# Altium PCB smart_charger_pcb.PcbDoc (part 2 of 2)
Units mm, origin at the board's own origin, x right, y up, seen from the top; angles counter-clockwise.
Board outline 250 x 183.13 mm, 4 copper layers (Top Layer, Ground, Power, Bottom Layer); 179 components, 118 nets, 581 pads, 0 vias.
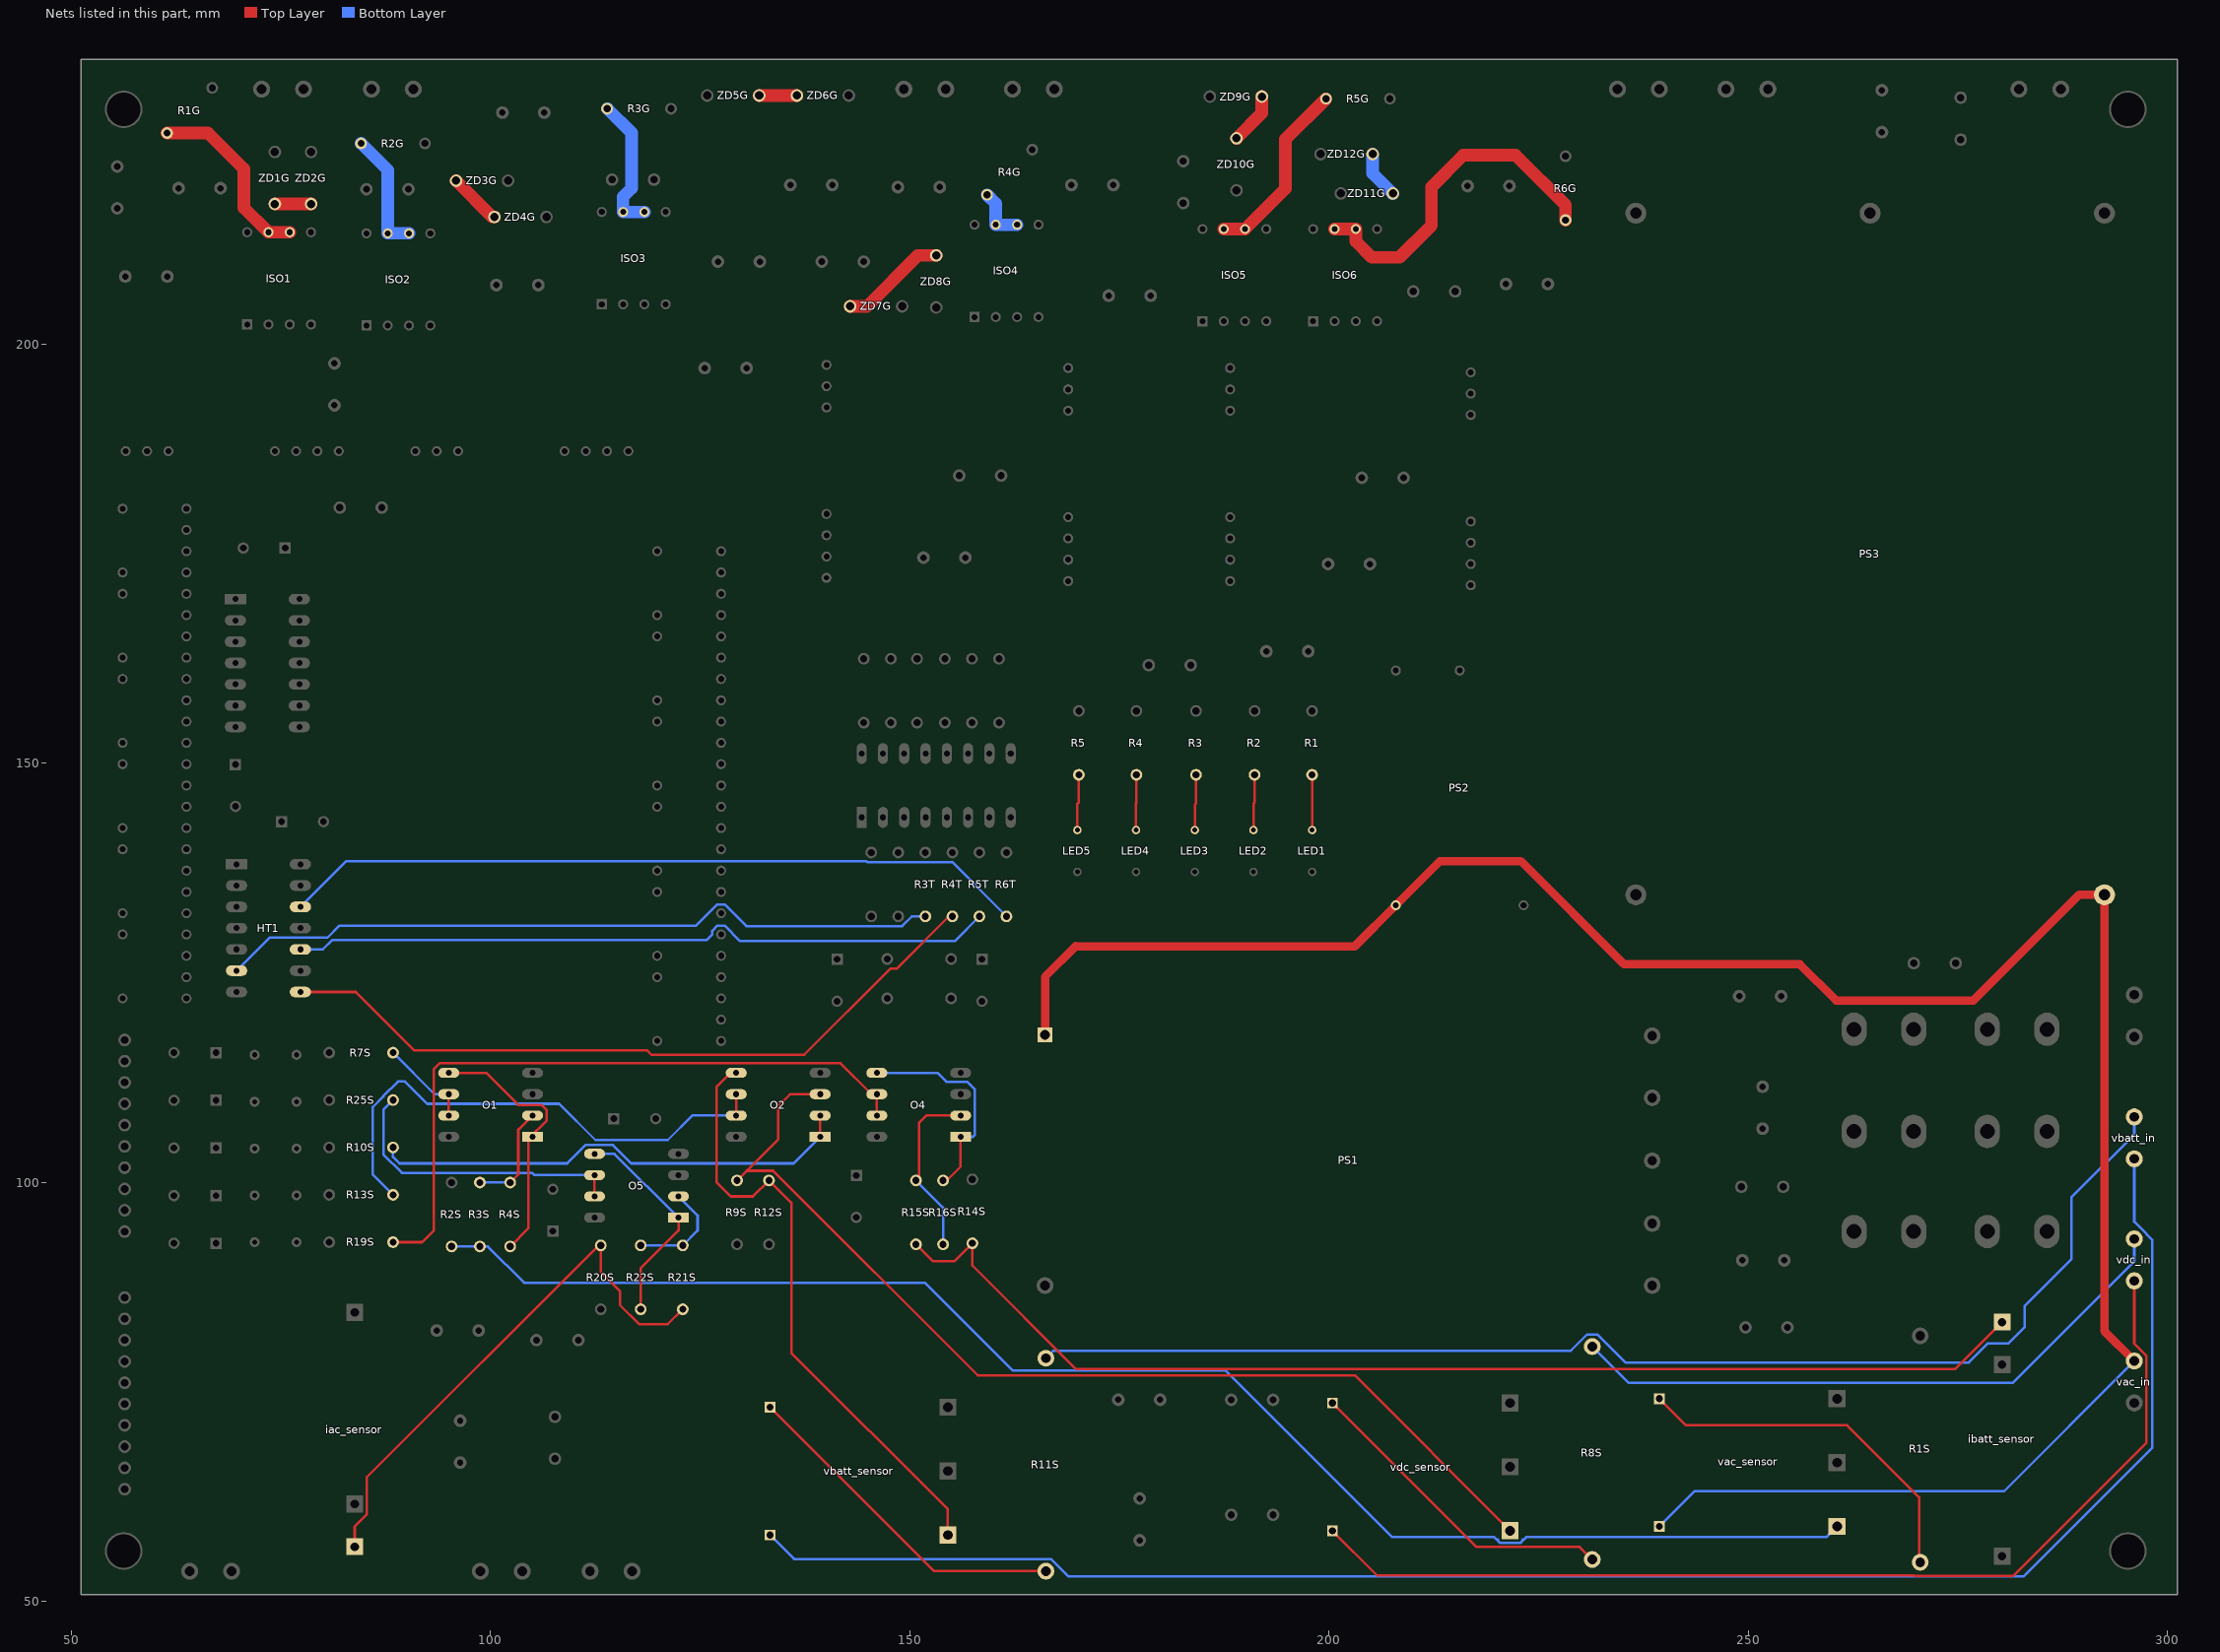
[diagram p4: the nets of this part, all layers, seen from the top]

## Nets (pads, with @x,y where several pads share a name; then routed paths per layer and width w, separated by ;. In a path a pad name is that pad's centre, name@x,y a point inside that pad or via, vN(x,y) a via of type N, cw(c..) or ccw(c..) an arc to the next point about the centre after c; other vN are vias at no path point) (continued)
NetHT1_3Y: HT1.3Y R3T.1 | length 87
  Bottom Layer w0.3: HT1.3Y@69.723,125.222 73.66,129.159 80.558,129.159 81.989,130.59 124.533,130.59 127.073,133.13 127.943,133.13 130.524,130.549 149.117,130.549 150.267,131.699 R3T.1@151.867,131.699
NetHT1_4Y: HT1.4Y R4T.1 | length 87.7
  Top Layer w0.3: HT1.4Y@77.343,122.682 83.947,122.682 90.932,115.697 118.698,115.697 119.205,115.19 137.415,115.19 147.694,125.469 148.47,125.469 154.7,131.699 R4T.1@155.092,131.699
NetHT1_5Y: HT1.5Y R5T.1 | length 84.4
  Bottom Layer w0.3: HT1.5Y@77.343,127.762 80.01,127.762 81.153,128.905 125.81,128.905 126.458,129.553 126.458,129.975 127.073,130.59 127.943,130.59 129.79,128.743 155.362,128.743 R5T.1@158.318,131.699
NetHT1_6Y: HT1.6Y R6T.1 | length 89.2
  Bottom Layer w0.3: HT1.6Y@77.343,132.842 82.804,138.303 144.805,138.303 144.939,138.169 155.074,138.169 R6T.1@161.544,131.699
Netiac_sensor_M: iac_sensor.M R20S.2 R21S.2 | length 65.1
  Top Layer w0.3: iac_sensor.M@83.82,56.515 83.82,58.927 85.286,60.393 85.286,64.839 112.649,92.202 113.157,92.202 113.157,89.281 115.443,86.995 115.443,85.344 117.729,83.058 121.158,83.058 R21S.2@122.936,84.836
Netibatt_sensor_M: ibatt_sensor.M R14S.2 R15S.2 | length 141.4
  Top Layer w0.3: R15S.2@150.749,92.583 152.781,90.551 155.321,90.551 R14S.2@157.48,92.71 157.48,90.043 169.799,77.724 274.701,77.724 ibatt_sensor.M@280.289,83.312
NetISO1_6: ISO1.6 ISO1.7 R1G.1 | length 22.2
  Top Layer w1.5: R1G.1@61.441,225.144 66.321,225.144 70.612,220.853 70.612,216.232 ISO1.7@73.533,213.311 ISO1.6@76.073,213.311
NetISO2_6: ISO2.6 ISO2.7 R2G.1 | length 14.6
  Bottom Layer w1.5: R2G.1@84.582,223.901 87.757,220.726 ISO2.7@87.757,213.184 ISO2.6@90.297,213.184
NetISO3_6: ISO3.6 ISO3.7 R3G.1 | length 16.5
  Bottom Layer w1.5: R3G.1@113.919,228.044 113.967,228.044 116.84,225.171 116.84,218.567 115.824,217.551 ISO3.7@115.824,215.724 ISO3.6@118.364,215.724
NetISO4_6: ISO4.6 ISO4.7 R4G.1 | length 6.6
  Bottom Layer w1.5: R4G.1@159.231,217.778 160.274,216.735 ISO4.7@160.274,214.2 ISO4.6@162.814,214.2
NetISO5_6: ISO5.6 ISO5.7 R5G.1 | length 22.1
  Top Layer w1.5: ISO5.7@187.452,213.692 ISO5.6@189.992,213.692 194.818,218.518 194.818,224.409 R5G.1@199.644,229.235
NetISO6_6: ISO6.6 ISO6.7 R6G.1 | length 41.8
  Top Layer w1.5: ISO6.7@200.66,213.692 ISO6.6@203.2,213.692 203.2,212.217 205.105,210.312 208.407,210.312 212.217,214.122 212.217,218.694 216.027,222.504 222.25,222.504 228.219,216.535 R6G.1@228.219,214.757
NetLED1_2: LED1.2 R1.2 | length 6.2
  Top Layer w0.3: R1.2@197.993,148.209 197.993,145.092 198,145.085 LED1.2@198,142
NetLED2_2: LED2.2 R2.2 | length 6.5
  Top Layer w0.3: LED2.2@191,142 191,145.161 191.135,145.296 R2.2@191.135,148.463
NetLED3_2: LED3.2 R3.2 | length 6.3
  Top Layer w0.3: LED3.2@184,142 184,145.009 184.15,145.159 R3.2@184.15,148.209
NetLED4_2: LED4.2 R4.2 | length 6.5
  Top Layer w0.3: LED4.2@177,142 177,145.212 177.038,145.25 R4.2@177.038,148.463
NetLED5_2: LED5.2 R5.1 | length 6.5
  Top Layer w0.3: LED5.2@170,142 170,145.136 170.18,145.316 R5.1@170.18,148.463
NetO1_1: O1.1 O1.5 R4S.1 | length 31.6
  Top Layer w0.3: O1.5@95.029,113.03 99.517,113.03 103.327,109.22 106.07,109.22 106.731,108.56 106.731,107.366 104.521,105.156 104.521,94.488 R4S.1@102.362,92.329
NetO1_2: O1.2 R3S.1 R4S.2 | length 12.8
  Top Layer w0.3: R4S.2@102.362,99.949 103.329,100.916 103.329,106.25 O1.2@105.029,107.95
  Bottom Layer w0.3: R3S.1@98.545,99.949 R4S.2@102.228,99.949
NetO1_6: O1.6 O1.7 R7S.2 | length 11.2
  Top Layer w0.3: O1.7@95.029,107.95 O1.6@95.029,110.49
  Bottom Layer w0.3: R7S.2@88.392,115.443 93.345,110.49 O1.6@95.029,110.49
NetO2_1: O2.1 O2.2 R10S.1 | length 58.1
  Top Layer w0.3: O2.1@139.319,105.41 O2.2@139.319,107.95
  Bottom Layer w0.3: R10S.1@88.392,104.14 88.392,102.997 89.154,102.235 109.15,102.235 111.343,104.428 114.607,104.428 116.8,102.235 136.144,102.235 O2.1@139.319,105.41
NetO2_3: O2.3 R9S.2 vdc_sensor.M | length 125.3
  Top Layer w0.3: R9S.2@129.413,100.203 130.563,101.353 ; O2.3@139.319,110.49 135.738,110.49 134.341,109.093 134.341,105.131 130.563,101.353 ; vdc_sensor.M@221.606,58.42 203.064,76.962 158.115,76.962 133.724,101.353 130.563,101.353
NetO2_5: O2.5 R12S.2 vbatt_sensor.M | length 73.3
  Top Layer w0.3: O2.5@129.319,113.03 128.651,113.03 127,111.379 127,99.949 128.651,98.298 131.318,98.298 R12S.2@133.223,100.203 135.89,97.536 135.89,79.629 154.55,60.969 vbatt_sensor.M@154.55,57.912
NetO2_6: O2.6 O2.7 R13S.1 | length 62.7
  Top Layer w0.3: O2.7@129.319,107.95 O2.6@129.319,110.49
  Bottom Layer w0.3: R13S.1@88.392,98.489 85.979,100.901 85.979,108.966 87.242,110.229 87.242,110.268 88.988,112.014 89.789,112.014 92.456,109.347 108.204,109.347 112.522,105.029 121.158,105.029 124.079,107.95 O2.7@129.319,107.95
NetO4_1: O4.1 O4.5 R16S.1 | length 26
  Top Layer w0.3: R16S.1@154.178,99.949 156.083,101.854 O4.1@156.083,105.41
  Bottom Layer w0.3: O4.5@146.083,113.03 153.314,113.03 154.381,111.963 156.87,111.963 157.785,111.049 157.785,105.664 157.531,105.41 O4.1@156.083,105.41
NetO4_2: O4.2 R15S.1 R16S.2 | length 20.8
  Top Layer w0.3: R15S.1@151.105,100.559 151.105,107.061 151.994,107.95 O4.2@156.083,107.95
  Bottom Layer w0.3: R15S.1@150.749,100.203 153.987,96.965 R16S.2@153.987,92.583
NetO4_6: O4.6 O4.7 R19S.2 | length 81.9
  Top Layer w0.3: R19S.2@88.392,92.837 91.846,92.837 93.269,94.259 93.269,113.513 93.929,114.173 141.757,114.173 145.44,110.49 O4.6@146.083,110.49 O4.7@146.083,107.95
NetO5_1: O5.1 O5.5 R22S.1 | length 25.9
  Top Layer w0.3: R22S.1@117.919,84.836 117.919,89.725 122.428,94.234 O5.1@122.428,95.758
  Bottom Layer w0.3: O5.5@112.428,103.378 114.808,103.378 O5.1@122.428,95.758
NetO5_2: O5.2 R21S.1 R22S.2 | length 12.5
  Bottom Layer w0.3: R22S.2@117.919,92.456 R21S.1@122.936,92.456 124.714,94.234 124.714,96.012 O5.2@122.428,98.298
NetO5_6: O5.6 O5.7 R25S.2 | length 35.7
  Top Layer w0.3: O5.7@112.428,98.298 O5.6@112.428,100.838
  Bottom Layer w0.3: R25S.2@88.392,109.791 87.242,108.641 87.242,103.298 89.441,101.099 104.997,101.099 105.258,100.838 O5.6@112.428,100.838
NetPS1_ACN: PS1.ACN PS2.1 PS3.2 vac_in.2 vac_sensor.HV- | length 273
  Top Layer w1: PS1.ACN@166.141,117.566 166.141,124.485 169.824,128.168 ; 169.824,128.118 203.068,128.118 PS2.1@207.975,133.025 213.253,138.303 222.885,138.303 235.204,125.984 256.159,125.984 260.477,121.666 276.86,121.666 289.473,134.279 PS3.2@292.481,134.279 292.481,82.216 vac_in.2@296.037,78.66
  Bottom Layer w0.3: vac_sensor.HV-@239.395,58.928 243.586,63.119 280.496,63.119 vac_in.2@296.037,78.66
NetR1S_2: R1S.2 vac_sensor.HV+ | length 43.8
  Top Layer w0.3: vac_sensor.HV+@239.395,74.168 242.57,70.993 261.798,70.993 270.383,62.408 R1S.2@270.383,54.483
NetR2S_2: R2S.2 R3S.2 vac_sensor.M | length 180
  Bottom Layer w0.3: 96.196,92.329 R3S.2@98.742,92.329 99.695,92.329 104.013,88.011 151.805,88.011 162.272,77.544 187.657,77.544 207.543,57.658 219.7,57.658 219.989,57.369 220.14,57.369 220.14,57.218 220.404,56.954 222.809,56.954 223.072,57.218 223.072,57.369 223.224,57.369 223.513,57.658 259.325,57.658 vac_sensor.M@260.595,58.928
NetR8S_1: R8S.1 vdc_in.2 | length 75.1
  Bottom Layer w0.3: R8S.1@231.394,80.391 235.712,76.073 281.559,76.073 296.037,90.551 vdc_in.2@296.037,93.223
NetR8S_2: R8S.2 vdc_sensor.HV+ | length 38.7
  Top Layer w0.3: vdc_sensor.HV+@200.406,73.66 217.576,56.49 229.895,56.49 R8S.2@231.394,54.991
NetR11S_1: R11S.1 vbatt_in.2 | length 151.5
  Bottom Layer w0.3: R11S.1@166.243,78.994 167.132,79.883 228.835,79.883 230.793,81.841 231.995,81.841 235.35,78.486 276.312,78.486 278.598,80.772 281.051,80.772 282.956,82.677 282.956,85.217 288.544,90.805 288.544,98.171 296.037,105.664 vbatt_in.2@296.037,107.785
NetR11S_2: R11S.2 vbatt_sensor.HV+ | length 41
  Top Layer w0.3: vbatt_sensor.HV+@133.35,73.152 152.908,53.594 R11S.2@166.243,53.594
Netvbatt_in_1: vbatt_in.1 vbatt_sensor.HV- | length 208.6
  Bottom Layer w0.3: vbatt_sensor.HV-@133.35,57.912 136.218,55.044 166.844,55.044 168.929,52.959 282.829,52.959 298.2,68.33 298.2,93.087 297.503,93.784 297.503,93.83 296.037,95.296 vbatt_in.1@296.037,102.785
Netvdc_in_1: vdc_in.1 vdc_sensor.HV- | length 125.8
  Top Layer w0.3: vdc_sensor.HV-@200.406,58.42 205.74,53.086 269.729,53.086 269.782,53.033 281.633,53.033 297.503,68.903 297.503,79.267 296.037,80.733 vdc_in.1@296.037,88.223
NetZD1G_2: ZD1G.2 ZD2G.2 | length 4.3
  Top Layer w1.5: ZD1G.2@74.295,216.685 ZD2G.2@78.613,216.685
NetZD3G_2: ZD3G.2 ZD4G.2 | length 6.4
  Top Layer w1.5: ZD3G.2@95.908,219.456 100.226,215.138 ZD4G.2@100.48,215.138
NetZD5G_2: ZD5G.2 ZD6G.2 | length 4.5
  Top Layer w1.5: ZD5G.2@132.057,229.616 ZD6G.2@136.548,229.616
NetZD7G_2: ZD7G.2 ZD8G.2 | length 12.8
  Top Layer w1.5: ZD7G.2@142.898,204.47 144.907,204.47 150.98,210.543 ZD8G.2@153.162,210.543
NetZD9G_2: ZD9G.2 ZD10G.2 | length 6.2
  Top Layer w1.5: ZD10G.2@188.976,224.513 192.001,227.538 ZD9G.2@192.001,229.489
NetZD11G_2: ZD11G.2 ZD12G.2 | length 5.7
  Bottom Layer w1.5: ZD12G.2@205.209,222.631 205.209,220.345 ZD11G.2@207.622,217.932
pads on no net: BJT1.7 BJT1.10 for1.5 for1.8 for2.5 for2.8 for3.5 for3.8 for4.5 for4.8 for5.5 for5.8 for6.5 for6.8 FOT1.3 FOT1.4 FOT1.5 FOT1.8 FOT2.3 FOT2.4 FOT2.5 FOT2.8 FOT3.3 FOT3.4 FOT3.5 FOT3.8 FOT4.3 FOT4.4 FOT4.5 FOT4.8 FOT5.3 FOT5.4 FOT5.5 FOT5.8 FOT6.3 FOT6.4 FOT6.5 FOT6.8 ISO1.1 ISO1.4 ISO2.1 ISO2.4 ISO3.1 ISO3.4 ISO4.1 ISO4.4 ISO5.1 ISO5.4 ISO6.1 ISO6.4 PS3.7

## Polygon pours and split planes (outlines as drawn)
EM6 on Ground (split plane): 259.09,226.06 259.099,225.942 259.099,224.984 254.45,220.335 236.728,220.335 236.61,220.326 236.496,220.298 236.386,220.253 236.286,220.192 236.196,220.115 232.259,216.178 232.182,216.088 232.121,215.988 232.089,215.91 232.076,215.878 232.048,215.764 232.039,215.646 232.039,190.49 208.524,190.49 208.524,207.772 208.515,207.89 208.487,208.004 208.442,208.114 208.381,208.214 208.304,208.304 208.214,208.381 208.114,208.442 208.004,208.487 207.89,208.515 207.772,208.524 196.332,208.524 196.332,224.8 243.205,224.8 243.323,224.809 243.437,224.837 243.547,224.882 243.647,224.943 243.737,225.02 243.814,225.11 243.875,225.21 243.92,225.32 243.948,225.434 243.957,225.552 243.957,233.424 259.09,233.424
EM5 on Ground (split plane): 242.453,226.304 195.58,226.304 195.462,226.295 195.348,226.267 195.238,226.222 195.138,226.161 195.048,226.084 194.971,225.994 194.91,225.894 194.865,225.784 194.837,225.67 194.828,225.552 194.828,208.524 181.102,208.524 180.984,208.515 180.87,208.487 180.76,208.442 180.66,208.381 180.57,208.304 180.493,208.214 180.432,208.114 180.387,208.004 180.359,207.89 180.35,207.772 180.35,199.898 180.359,199.78 180.387,199.666 180.432,199.556 180.493,199.456 180.57,199.366 180.66,199.289 180.76,199.228 180.87,199.183 180.984,199.155 181.102,199.146 191.145,199.146 191.145,190.363 172.329,190.363 172.329,203.2 172.329,211.201 172.32,211.319 172.292,211.433 172.247,211.543 172.186,211.643 172.109,211.733 166.995,216.847 166.995,221.498 175.988,221.498 176.061,221.453 176.171,221.408 176.285,221.38 176.403,221.371 176.521,221.38 176.635,221.408 176.745,221.453 176.845,221.514 176.935,221.591 177.012,221.681 177.073,221.781 177.118,221.891 177.146,222.005 177.155,222.123 177.155,233.424 242.453,233.424
EM4 on Ground (split plane): 175.651,223.002 166.624,223.002 166.506,222.993 166.392,222.965 166.282,222.92 166.182,222.859 166.092,222.782 165.711,222.401 165.634,222.311 165.573,222.211 165.541,222.133 165.528,222.101 165.5,221.987 165.491,221.869 165.491,216.535 165.5,216.417 165.528,216.303 165.541,216.271 165.573,216.193 165.634,216.093 165.711,216.003 170.825,210.889 170.825,203.2 170.825,190.363 165.725,190.363 165.725,205.613 165.716,205.731 165.688,205.845 165.643,205.955 165.582,206.055 165.505,206.145 165.415,206.222 165.315,206.283 165.205,206.328 165.091,206.356 164.973,206.365 157.48,206.365 157.362,206.356 157.248,206.328 157.138,206.283 157.038,206.222 156.948,206.145 156.871,206.055 156.81,205.955 156.765,205.845 156.737,205.731 156.728,205.613 156.728,203.512 152.85,199.634 144.203,199.634 134.737,209.1 134.737,222.768 158.115,222.768 158.233,222.777 158.347,222.805 158.457,222.85 158.557,222.911 158.647,222.988 158.724,223.078 158.785,223.178 158.83,223.288 158.858,223.402 158.867,223.52 158.867,233.424 175.651,233.424
EM3 on Ground (split plane): 157.363,224.272 133.985,224.272 133.867,224.263 133.753,224.235 133.643,224.19 133.543,224.129 133.453,224.052 133.376,223.962 133.315,223.862 133.27,223.752 133.242,223.638 133.233,223.52 133.233,208.788 133.242,208.67 133.27,208.556 133.283,208.524 133.315,208.446 133.376,208.346 133.453,208.256 143.139,198.57 143.139,192.463 140.785,190.109 130.36,190.109 123.815,196.654 123.815,210.566 123.806,210.684 123.778,210.798 123.733,210.908 123.672,211.008 123.595,211.098 123.505,211.175 123.405,211.236 123.295,211.281 123.181,211.309 123.063,211.318 110.734,211.318 110.734,233.424 157.363,233.424
EM2 on Ground (split plane): 109.23,198.364 98.425,198.364 98.307,198.355 98.193,198.327 98.083,198.282 97.983,198.221 97.893,198.144 97.816,198.054 97.755,197.954 97.71,197.844 97.682,197.73 97.673,197.612 97.673,186.24 96.716,185.283 90.863,185.283 87.366,188.78 87.366,194.252 94.512,201.398 94.589,201.488 94.65,201.588 94.695,201.698 94.723,201.812 94.732,201.93 94.732,203.708 94.723,203.826 94.695,203.94 94.682,203.972 94.65,204.05 94.589,204.15 94.512,204.24 91.337,207.415 91.247,207.492 91.147,207.553 91.069,207.585 91.037,207.598 90.923,207.626 90.805,207.635 82.413,207.635 82.413,233.424 109.23,233.424
EM1 on Ground (split plane): 80.909,207.635 67.31,207.635 67.192,207.626 67.078,207.598 66.968,207.553 66.868,207.492 66.778,207.415 66.72,207.346 66.651,207.288 66.574,207.198 66.513,207.098 66.468,206.988 66.44,206.874 66.431,206.756 66.431,188.595 66.431,183.124 51.691,183.124 51.691,233.424 80.909,233.424
GND1 on Ground (split plane): 141.835,157.964 141.925,157.887 141.963,157.864 142.025,157.826 142.103,157.794 142.135,157.781 142.157,157.775 142.249,157.753 142.367,157.744 199.967,157.744 201.525,156.186 201.615,156.109 201.715,156.048 201.825,156.003 201.939,155.975 202.057,155.966 218.186,155.966 218.304,155.975 218.418,156.003 218.45,156.016 218.528,156.048 218.628,156.109 218.718,156.186 220.911,158.379 300.671,158.379 300.671,51.31 51.691,51.31 51.691,119.009 63.881,119.009 63.999,119.018 64.113,119.046 64.145,119.059 64.223,119.091 64.323,119.152 64.413,119.229 66.699,121.515 66.776,121.605 66.837,121.705 66.86,121.76 66.882,121.815 66.91,121.929 66.919,122.047 66.919,138.118 76.766,147.965 88.392,147.965 88.51,147.974 88.624,148.002 88.656,148.015 88.734,148.047 88.834,148.108 88.924,148.185 112.453,171.714 128.085,171.714
GND2 on Ground (split plane): 318 vertices, not listed, extent 51.691,120.513 300.671,233.424
EM5 on Power (split plane): 242.453,226.304 195.58,226.304 195.462,226.295 195.348,226.267 195.238,226.222 195.138,226.161 195.048,226.084 194.971,225.994 194.91,225.894 194.865,225.784 194.837,225.67 194.828,225.552 194.828,208.524 181.102,208.524 180.984,208.515 180.87,208.487 180.76,208.442 180.66,208.381 180.57,208.304 180.493,208.214 180.432,208.114 180.387,208.004 180.359,207.89 180.35,207.772 180.35,207.518 180.35,199.898 180.359,199.78 180.387,199.666 180.432,199.556 180.493,199.456 180.57,199.366 180.66,199.289 180.76,199.228 180.87,199.183 180.984,199.155 181.102,199.146 191.145,199.146 191.145,190.363 172.329,190.363 172.329,211.201 172.32,211.319 172.292,211.433 172.247,211.543 172.186,211.643 172.109,211.733 166.995,216.847 166.995,220.853 166.995,221.498 176.403,221.498 176.521,221.507 176.635,221.535 176.745,221.58 176.845,221.641 176.935,221.718 177.012,221.808 177.073,221.908 177.118,222.018 177.146,222.132 177.155,222.25 177.155,233.424 242.453,233.424
EM6 on Power (split plane): 259.09,224.975 255.373,221.258 254.45,220.335 236.728,220.335 236.61,220.326 236.496,220.298 236.386,220.253 236.286,220.192 236.196,220.115 232.259,216.178 232.182,216.088 232.121,215.988 232.089,215.91 232.076,215.878 232.048,215.764 232.039,215.646 232.039,190.49 208.524,190.49 208.524,207.772 208.515,207.89 208.487,208.004 208.442,208.114 208.381,208.214 208.304,208.304 208.214,208.381 208.114,208.442 208.004,208.487 207.89,208.515 207.772,208.524 196.332,208.524 196.332,224.8 243.205,224.8 243.323,224.809 243.437,224.837 243.547,224.882 243.647,224.943 243.737,225.02 243.814,225.11 243.875,225.21 243.92,225.32 243.948,225.434 243.957,225.552 243.957,233.424 259.09,233.424
EM4 on Power (split plane): 175.651,223.002 166.624,223.002 166.506,222.993 166.392,222.965 166.282,222.92 166.182,222.859 166.092,222.782 165.711,222.401 165.634,222.311 165.573,222.211 165.541,222.133 165.528,222.101 165.5,221.987 165.491,221.869 165.491,220.853 165.491,216.789 165.491,216.535 165.5,216.417 165.528,216.303 165.541,216.271 165.573,216.193 165.634,216.093 165.711,216.003 170.825,210.889 170.825,190.363 165.725,190.363 165.725,205.613 165.716,205.731 165.688,205.845 165.643,205.955 165.582,206.055 165.505,206.145 165.415,206.222 165.315,206.283 165.205,206.328 165.091,206.356 164.973,206.365 157.48,206.365 157.362,206.356 157.248,206.328 157.138,206.283 157.038,206.222 156.948,206.145 156.871,206.055 156.81,205.955 156.765,205.845 156.737,205.731 156.728,205.613 156.728,203.512 152.85,199.634 144.203,199.634 134.737,209.1 134.737,222.768 158.115,222.768 158.233,222.777 158.347,222.805 158.457,222.85 158.557,222.911 158.647,222.988 158.724,223.078 158.785,223.178 158.83,223.288 158.858,223.402 158.867,223.52 158.867,233.424 175.651,233.424
EM3 on Power (split plane): 157.363,224.272 133.985,224.272 133.867,224.263 133.753,224.235 133.643,224.19 133.543,224.129 133.453,224.052 133.376,223.962 133.315,223.862 133.27,223.752 133.242,223.638 133.233,223.52 133.233,208.788 133.242,208.67 133.27,208.556 133.283,208.524 133.315,208.446 133.376,208.346 133.453,208.256 143.139,198.57 143.139,192.463 141.161,190.485 141.106,190.481 140.992,190.453 140.882,190.408 140.782,190.347 140.692,190.27 140.615,190.18 140.572,190.109 130.36,190.109 123.815,196.654 123.815,210.439 123.815,210.693 123.806,210.811 123.778,210.925 123.733,211.035 123.672,211.135 123.595,211.225 123.505,211.302 123.405,211.363 123.295,211.408 123.181,211.436 123.063,211.445 122.945,211.436 122.853,211.414 122.831,211.408 122.799,211.395 122.721,211.363 122.659,211.325 122.648,211.318 110.734,211.318 110.734,233.424 157.363,233.424
-15V on Power (split plane): 249.183,108.477 249.301,108.468 259.09,108.468 259.09,88.646 259.099,88.528 259.127,88.414 259.14,88.382 259.172,88.304 259.233,88.204 259.31,88.114 265.152,82.272 265.242,82.195 265.342,82.134 265.397,82.111 265.452,82.089 265.566,82.061 265.684,82.052 300.671,82.052 300.671,70.221 253.228,70.221 253.228,92.202 253.219,92.32 253.197,92.412 253.191,92.434 253.178,92.466 253.146,92.544 253.085,92.644 253.008,92.734 247.42,98.322 247.33,98.399 247.23,98.46 247.152,98.492 247.12,98.505 247.006,98.533 246.888,98.542 235.839,98.542 235.721,98.533 235.607,98.505 235.497,98.46 235.397,98.399 235.307,98.322 233.529,96.544 233.452,96.454 233.391,96.354 233.359,96.276 233.346,96.244 233.318,96.13 233.309,96.012 233.309,70.221 96.393,70.221 96.275,70.212 96.183,70.19 96.161,70.184 96.129,70.171 96.051,70.139 95.989,70.101 95.951,70.078 95.861,70.001 85.667,59.807 81.973,59.807 80.508,61.272 80.508,65.093 93.149,77.734 111.887,77.734 215.646,77.734 215.764,77.743 215.878,77.771 215.91,77.784 215.988,77.816 216.088,77.877 216.178,77.954 228.624,90.4 228.701,90.49 228.762,90.59 228.807,90.7 228.835,90.814 228.844,90.932 228.844,108.468 233.019,108.468 236.228,105.259 236.318,105.182 236.418,105.121 236.527,105.076 236.642,105.048 236.76,105.039 240.379,105.039 240.497,105.048 240.612,105.076 240.644,105.089 240.721,105.121 240.821,105.182 240.911,105.259 244.12,108.468 249.047,108.468 249.165,108.477 249.174,108.479
EM2 on Power (split plane): 109.23,198.364 98.425,198.364 98.307,198.355 98.193,198.327 98.083,198.282 97.983,198.221 97.893,198.144 97.816,198.054 97.755,197.954 97.71,197.844 97.682,197.73 97.673,197.612 97.673,186.24 96.716,185.283 90.863,185.283 87.366,188.78 87.366,194.252 94.512,201.398 94.589,201.488 94.65,201.588 94.695,201.698 94.723,201.812 94.732,201.93 94.732,203.708 94.723,203.826 94.695,203.94 94.682,203.972 94.65,204.05 94.589,204.15 94.512,204.24 91.337,207.415 91.247,207.492 91.147,207.553 91.069,207.585 91.037,207.598 90.923,207.626 90.805,207.635 82.413,207.635 82.413,233.424 109.23,233.424
15V2 on Power (split plane): 255 vertices, not listed, extent 67.935,159.883 300.671,233.424
5V2 on Power (split plane): 79.986,176.633 80.076,176.556 80.114,176.533 80.176,176.495 80.254,176.463 80.286,176.45 80.308,176.444 80.4,176.422 80.518,176.413 99.568,176.413 99.686,176.422 99.8,176.45 99.832,176.463 99.91,176.495 100.01,176.556 100.1,176.633 104.96,181.493 133.419,181.493 134.376,180.536 134.376,173.355 134.385,173.237 134.413,173.123 134.426,173.091 134.458,173.013 134.519,172.913 134.596,172.823 138.152,169.267 138.242,169.19 138.342,169.129 138.42,169.097 138.452,169.084 138.566,169.056 138.684,169.047 219.72,169.047 219.72,159.316 217.874,157.47 202.369,157.47 200.811,159.028 200.721,159.105 200.621,159.166 200.543,159.198 200.511,159.211 200.397,159.239 200.279,159.248 142.679,159.248 128.929,172.998 128.839,173.075 128.739,173.136 128.661,173.168 128.629,173.181 128.515,173.209 128.397,173.218 112.268,173.218 112.15,173.209 112.058,173.187 112.036,173.181 112.004,173.168 111.926,173.136 111.826,173.075 111.736,172.998 88.207,149.469 76.454,149.469 76.336,149.46 76.222,149.432 76.19,149.419 76.112,149.387 76.012,149.326 75.922,149.249 65.635,138.962 65.558,138.872 65.497,138.772 65.465,138.694 65.452,138.662 65.424,138.548 65.415,138.43 65.415,122.359 63.569,120.513 51.691,120.513 51.691,181.62 74.999,181.62
EM1 on Power (split plane): 80.909,207.635 67.183,207.635 67.065,207.626 66.951,207.598 66.841,207.553 66.741,207.492 66.651,207.415 66.574,207.325 66.513,207.225 66.468,207.115 66.44,207.001 66.431,206.883 66.431,183.124 51.691,183.124 51.691,233.424 80.909,233.424
5V1 on Power (split plane): 141.835,157.964 141.925,157.887 141.963,157.864 142.025,157.826 142.103,157.794 142.135,157.781 142.157,157.775 142.249,157.753 142.367,157.744 199.967,157.744 201.525,156.186 201.615,156.109 201.715,156.048 201.825,156.003 201.939,155.975 202.057,155.966 218.186,155.966 218.304,155.975 218.418,156.003 218.45,156.016 218.528,156.048 218.628,156.109 218.718,156.186 220.69,158.158 220.704,158.162 220.814,158.207 220.914,158.268 221.004,158.345 221.033,158.379 300.671,158.379 300.671,83.556 265.996,83.556 260.594,88.958 260.594,109.22 260.585,109.338 260.557,109.452 260.512,109.562 260.451,109.662 260.374,109.752 260.284,109.829 260.184,109.89 260.074,109.935 259.96,109.963 259.842,109.972 249.301,109.972 249.183,109.963 249.174,109.961 249.165,109.963 249.047,109.972 243.808,109.972 243.691,109.963 243.576,109.935 243.467,109.89 243.366,109.829 243.276,109.752 240.068,106.543 237.071,106.543 233.863,109.752 233.773,109.829 233.672,109.89 233.595,109.922 233.563,109.935 233.448,109.963 233.331,109.972 228.092,109.972 227.974,109.963 227.86,109.935 227.75,109.89 227.65,109.829 227.56,109.752 227.483,109.662 227.422,109.562 227.377,109.452 227.349,109.338 227.34,109.22 227.34,91.244 215.334,79.238 112.199,79.238 102.513,88.924 102.423,89.001 102.323,89.062 102.245,89.094 102.213,89.107 102.099,89.135 101.981,89.144 78.867,89.144 78.749,89.135 78.657,89.113 78.635,89.107 78.603,89.094 78.525,89.062 78.463,89.024 78.425,89.001 78.335,88.924 73.128,83.717 73.051,83.627 72.99,83.527 72.958,83.449 72.945,83.417 72.917,83.303 72.908,83.185 72.908,51.31 51.691,51.31 51.691,119.009 63.881,119.009 63.999,119.018 64.113,119.046 64.145,119.059 64.223,119.091 64.323,119.152 64.413,119.229 66.699,121.515 66.776,121.605 66.837,121.705 66.86,121.76 66.882,121.815 66.91,121.929 66.919,122.047 66.919,138.118 76.766,147.965 88.519,147.965 88.637,147.974 88.751,148.002 88.783,148.015 88.861,148.047 88.961,148.108 89.051,148.185 112.58,171.714 128.085,171.714
+15V on Power (split plane): 251.724,91.89 251.724,69.469 251.733,69.351 251.761,69.237 251.806,69.127 251.867,69.027 251.944,68.937 252.034,68.86 252.134,68.799 252.244,68.754 252.358,68.726 252.476,68.717 300.671,68.717 300.671,51.31 74.412,51.31 74.412,82.873 79.179,87.64 101.669,87.64 110.071,79.238 92.837,79.238 92.719,79.229 92.605,79.201 92.573,79.188 92.495,79.156 92.395,79.095 92.305,79.018 79.224,65.937 79.147,65.847 79.086,65.747 79.054,65.669 79.041,65.637 79.013,65.523 79.004,65.405 79.004,60.96 79.013,60.842 79.041,60.728 79.054,60.696 79.086,60.618 79.147,60.518 79.224,60.428 81.129,58.523 81.219,58.446 81.319,58.385 81.374,58.362 81.429,58.34 81.543,58.312 81.661,58.303 85.979,58.303 86.097,58.312 86.211,58.34 86.243,58.353 86.321,58.385 86.421,58.446 86.511,58.523 96.705,68.717 234.061,68.717 234.179,68.726 234.293,68.754 234.403,68.799 234.503,68.86 234.593,68.937 234.67,69.027 234.731,69.127 234.776,69.237 234.804,69.351 234.813,69.469 234.813,95.7 236.151,97.038 246.576,97.038

## Keep-outs
Keep-Out Layer:
  lines w0.3: 52.8,52.07 52.8,231.902 298.8,231.902 298.8,52.07 52.8,52.07

## Other copper
Ground (plane layer: these items are gaps in the copper):
  lines w1.5: 51.181,119.761 63.881,119.761 66.167,122.047 66.167,138.43 76.454,148.717 88.392,148.717 112.141,172.466 128.397,172.466 142.367,158.496 163.957,158.496 200.279,158.496 202.057,156.718 218.186,156.718 220.599,159.131 301.054,159.131 301.181,159.258 ; 51.181,182.372 67.056,182.372 67.183,182.499 67.183,188.595 67.183,206.756 ; 67.31,206.883 81.661,206.883 ; 81.661,233.934 81.661,206.883 ; 109.982,210.566 123.063,210.566 123.063,196.342 130.048,189.357 141.097,189.357 143.891,192.151 143.891,198.882 ; 109.982,233.934 109.982,197.866 109.728,197.612 98.425,197.612 98.425,185.928 97.028,184.531 90.551,184.531 86.614,188.468 86.614,194.564 93.98,201.93 93.98,203.708 90.805,206.883 81.661,206.883 ; 143.891,198.628 143.891,198.882 ; 158.115,233.68 158.115,223.52 142.494,223.52 133.985,223.52 133.985,208.788 143.891,198.882 ; 171.577,189.611 165.1,189.611 164.973,189.738 164.973,205.613 157.48,205.613 157.48,203.2 153.162,198.882 143.891,198.882 ; 176.403,222.123 176.403,233.934 ; 176.403,222.25 166.624,222.25 166.243,221.869 166.243,216.535 171.577,211.201 171.577,203.2 171.577,189.738 171.45,189.611 191.389,189.611 ; 191.897,189.611 191.897,199.898 181.102,199.898 181.102,207.772 207.772,207.772 207.772,189.738 221.615,189.738 224.663,189.738 230.632,189.738 232.41,189.738 232.791,190.119 232.791,215.646 236.728,219.583 254.762,219.583 259.842,224.663 ; 195.58,207.899 195.58,225.552 229.87,225.552 243.205,225.552 243.205,233.934 ; 259.842,233.807 259.842,226.06 259.851,226.051 259.851,224.908
Power (plane layer: these items are gaps in the copper):
  lines w1.5: 51.181,119.888 51.308,119.761 63.881,119.761 66.167,122.047 66.167,138.43 76.454,148.717 88.519,148.717 112.268,172.466 128.397,172.466 142.367,158.496 163.957,158.496 200.279,158.496 202.057,156.718 218.186,156.718 220.472,159.004 220.472,159.131 301.054,159.131 ; 51.308,182.372 75.311,182.372 80.518,177.165 99.568,177.165 104.648,182.245 133.731,182.245 135.128,180.848 135.128,173.355 138.684,169.799 220.345,169.799 220.472,169.672 220.472,158.877 ; 67.183,182.499 67.183,206.883 90.805,206.883 93.98,203.708 93.98,201.93 86.614,194.564 86.614,188.468 90.551,184.531 97.028,184.531 98.425,185.928 98.425,197.612 109.855,197.612 ; 73.66,50.8 73.66,83.185 78.867,88.392 87.122,88.392 ; 81.661,206.883 81.661,233.934 ; 86.868,88.392 101.981,88.392 111.887,78.486 ; 109.982,197.739 109.982,233.934 ; 109.982,210.566 122.936,210.566 123.063,210.693 123.063,210.439 123.063,196.342 130.048,189.357 141.097,189.357 141.351,189.611 ; 141.224,189.738 141.224,189.611 141.351,189.611 ; 144.018,198.882 143.891,198.882 ; 158.115,233.934 158.115,223.52 133.985,223.52 133.985,208.788 143.891,198.882 ; 176.403,233.934 176.403,222.25 166.624,222.25 166.243,221.869 166.243,220.853 166.243,216.789 166.243,216.535 171.577,211.201 171.577,189.611 ; 195.58,207.772 195.58,225.552 229.87,225.552 243.205,225.552 243.205,233.934 ; 232.791,189.738 207.772,189.738 207.772,207.772 181.102,207.772 181.102,207.518 181.102,199.898 191.897,199.898 191.897,189.611 171.577,189.611 ; 232.791,190.119 232.791,215.646 236.728,219.583 254.635,219.583 254.762,219.583 255.905,220.726 259.842,224.663 259.842,233.807 ; 249.047,109.22 243.808,109.22 240.379,105.791 236.76,105.791 233.331,109.22 228.092,109.22 228.092,90.932 215.646,78.486 140.716,78.486 92.837,78.486 79.756,65.405 79.756,60.96 81.661,59.055 85.979,59.055 96.393,69.469 234.061,69.469 234.061,96.012 235.839,97.79 246.888,97.79 252.476,92.202 252.476,69.469 301.181,69.469 ; 249.301,109.22 259.842,109.22 259.842,88.646 265.684,82.804 301.181,82.804 ; 141.351,189.611 143.891,192.151 143.891,198.882 ; 143.891,198.882 153.162,198.882 157.48,203.2 157.48,205.613 164.973,205.613 164.973,189.611 171.577,189.611

## Silkscreen, mask and mechanical layers (free items; w line width, h text height)
Top Overlay:
  lines w0.3: 53.112,54.202 53.112,57.868 56.287,59.695 59.462,57.868 59.462,54.202 56.287,52.375 53.112,54.202 ; 53.112,226.16 53.112,229.826 56.287,231.653 59.462,229.826 59.462,226.16 56.287,224.333 53.112,226.16 ; 292.126,54.202 295.301,52.375 298.476,54.202 298.476,57.868 295.301,59.695 292.126,57.868 292.126,54.202 ; 292.126,226.16 292.126,229.826 295.301,231.653 298.476,229.826 298.476,226.16 295.301,224.333 292.126,226.16
  text "G" at 65.405,232.283 h1
  text "E" at 96.52,232.283 h1
  text "G" at 142.24,232.283 h1
  text "E" at 172.974,232.283 h1
  text "G" at 225.806,232.283 h1
  text "E" at 258.318,232.156 h1
  text "+" at 287.528,223.647 h1 r270
  text "Jordan Morris" at 85.725,166.37 h1
  text "May. 7, 2014" at 85.725,163.298 h1
  text "Smart Charger Board V1.0" at 85.725,159.893 h1
  text "+" at 299.466,117.348 h1 r270
  text "+" at 299.085,109.728 h1 r270
  text "+" at 299.466,94.234 h1 r270
  text "IBATT SENSOR" at 288.29,86.741 h1 r270
  text "IAC SENSOR" at 75.565,78.105 h1 r90
  text "+" at 299.466,72.009 h1 r270
Mechanical 14:
  lines w1.5: 59.906,130.112 105.906,130.112 105.906,221.112 59.906,221.112 59.906,130.112 ; 140.678,130.62 186.678,130.62 186.678,221.62 140.678,221.62 140.678,130.62 ; 222.847,129.731 268.847,129.731 268.847,220.731 222.847,220.731 222.847,129.731
Drill Drawing:
  text ".LEGEND" at 303.721,79.121 h1.52
  text "Drill Drawing." at 303.721,76.581 h1.52

## Dimensions
52.8,52.07 to 52.8,231.902 on Mechanical 1
52.8,52.07 to 298.8,52.07 on Mechanical 1

## Text inside footprints (layer, text, board x,y; h text height)
C1: Top Overlay "+" at 248.666,123.571 h0.76
C1G: Top Overlay "+" at 63.627,208.407 h0.76 r180
C2: Top Overlay "+" at 249.936,111.633 h0.76 r270
C2G: Top Overlay "+" at 67.945,216.789 h0.76 r180
C3: Top Overlay "+" at 249.047,88.9 h0.76
C3G: Top Overlay "+" at 100.457,204.978 h0.76
C4: Top Overlay "+" at 192.278,161.544 h0.76
C4G: Top Overlay "+" at 106.68,229.362 h0.76 r180
C5: Top Overlay "+" at 263.652,230.378 h0.76 r270
C5G: Top Overlay "+" at 132.461,197.485 h0.76 r180
C6G: Top Overlay "+" at 126.873,207.772 h0.76
C7G: Top Overlay "+" at 135.509,217.043 h0.76
C8G: Top Overlay "+" at 148.336,216.916 h0.76
C9G: Top Overlay "+" at 169.037,217.17 h0.76
C10G: Top Overlay "+" at 173.482,203.962 h0.76
C11G: Top Overlay "+" at 220.853,205.232 h0.76
C12: Top Overlay "+" at 95.25,81.915 h0.76
C12G: Top Overlay "+" at 216.281,217.043 h0.76
C13: Top Overlay "+" at 179.959,57.023 h0.76 r90
C13G: Top Overlay "+" at 83.439,192.405 h0.76 r90
C14: Top Overlay "+" at 98.171,66.294 h0.76 r90
C14G: Top Overlay "+" at 151.384,172.466 h0.76
C15: Top Overlay "+" at 174.625,71.755 h0.76
C15G: Top Overlay "+" at 199.644,171.831 h0.76
C16S: Top Overlay "CAP CERAM" at 105.791,78.613 h0.5
C17S: Top Overlay "CAP CERAM" at 188.468,57.912 h0.5
C18S: Top Overlay "CAP CERAM" at 105.283,71.882 h0.5 r270
C19S: Top Overlay "CAP CERAM" at 188.468,71.628 h0.5
CC1G: Top Overlay "CAP CERAM" at 57.912,216.281 h0.5 r90
CC1P: Top Overlay "CAP CERAM" at 272.923,229.235 h0.5 r270
CC2P: Top Overlay "CAP CERAM" at 178.816,163.576 h0.5
CC3G: Top Overlay "CAP CERAM" at 114.633,217.17 h0.5
CC4G: Top Overlay "CAP CERAM" at 144.399,212.217 h0.5 r180
CC5G: Top Overlay "CAP CERAM" at 184.658,221.107 h0.5 r270
CC5P: Top Overlay "CAP CERAM" at 249.809,80.264 h0.5
CC6G: Top Overlay "CAP CERAM" at 210.185,203.835 h0.5
CC7G: Top Overlay "CAP CERAM" at 82.169,178.054 h0.5
CC8G: Top Overlay "CAP CERAM" at 160.782,186.69 h0.5 r180
CC9G: Top Overlay "CAP CERAM" at 204.216,181.61 h0.5
DCDC1: Top Overlay "VLA106-15242" at 59.309,183.642 h1.52
DCDC2: Top Overlay "VLA106-15242" at 93.853,183.642 h1.52
DCDC3: Top Overlay "VLA106-15242" at 136.525,194.691 h1.52 r270
DCDC4: Top Overlay "VLA106-15242" at 165.354,194.31 h1.52 r270
DCDC5: Top Overlay "VLA106-15242" at 184.658,194.31 h1.52 r270
DCDC6: Top Overlay "VLA106-15242" at 213.36,193.802 h1.52 r270
for1: Top Overlay "5" at 55.245,129.286 h0.89 r90; Top Overlay "Rx" at 55.753,124.079 h1.52 r90; Top Overlay "8" at 55.118,121.666 h0.89 r90; Top Overlay "Optical Fiber" at 58.166,121.158 h0.76 r90; Top Overlay "1  2  3  4" at 62.738,121.539 h0.89 r90
for2: Top Overlay "5" at 55.245,139.446 h0.89 r90; Top Overlay "Rx" at 55.753,134.239 h1.52 r90; Top Overlay "8" at 55.118,131.826 h0.89 r90; Top Overlay "Optical Fiber" at 58.166,131.318 h0.76 r90; Top Overlay "1  2  3  4" at 62.738,131.699 h0.89 r90
for3: Top Overlay "5" at 55.245,149.606 h0.89 r90; Top Overlay "Rx" at 55.753,144.399 h1.52 r90; Top Overlay "8" at 55.118,141.986 h0.89 r90; Top Overlay "Optical Fiber" at 58.166,141.478 h0.76 r90; Top Overlay "1  2  3  4" at 62.738,141.859 h0.89 r90
for4: Top Overlay "5" at 55.245,159.766 h0.89 r90; Top Overlay "Rx" at 55.753,154.559 h1.52 r90; Top Overlay "8" at 55.118,152.146 h0.89 r90; Top Overlay "Optical Fiber" at 58.166,151.638 h0.76 r90; Top Overlay "1  2  3  4" at 62.738,152.019 h0.89 r90
for5: Top Overlay "5" at 55.245,169.926 h0.89 r90; Top Overlay "Rx" at 55.753,164.719 h1.52 r90; Top Overlay "8" at 55.118,162.306 h0.89 r90; Top Overlay "Optical Fiber" at 58.166,161.798 h0.76 r90; Top Overlay "1  2  3  4" at 62.738,162.179 h0.89 r90
for6: Top Overlay "5" at 55.245,180.086 h0.89 r90; Top Overlay "Rx" at 55.753,174.879 h1.52 r90; Top Overlay "8" at 55.118,172.466 h0.89 r90; Top Overlay "Optical Fiber" at 58.166,171.958 h0.76 r90; Top Overlay "1  2  3  4" at 62.738,172.339 h0.89 r90
FOT1: Top Overlay "5" at 118.999,124.206 h0.89 r90; Top Overlay "Tx" at 119.507,118.999 h1.52 r90; Top Overlay "8" at 118.872,116.586 h0.89 r90; Top Overlay "Optical Fiber" at 121.92,116.078 h0.76 r90; Top Overlay "1  2  3  4" at 126.492,116.459 h0.89 r90
FOT2: Top Overlay "5" at 118.999,134.366 h0.89 r90; Top Overlay "Tx" at 119.507,129.159 h1.52 r90; Top Overlay "8" at 118.872,126.746 h0.89 r90; Top Overlay "Optical Fiber" at 121.92,126.238 h0.76 r90; Top Overlay "1  2  3  4" at 126.492,126.619 h0.89 r90
FOT3: Top Overlay "5" at 118.999,144.526 h0.89 r90; Top Overlay "Tx" at 119.507,139.319 h1.52 r90; Top Overlay "8" at 118.872,136.906 h0.89 r90; Top Overlay "Optical Fiber" at 121.92,136.398 h0.76 r90; Top Overlay "1  2  3  4" at 126.492,136.779 h0.89 r90
FOT4: Top Overlay "5" at 118.999,154.686 h0.89 r90; Top Overlay "Tx" at 119.507,149.479 h1.52 r90; Top Overlay "8" at 118.872,147.066 h0.89 r90; Top Overlay "Optical Fiber" at 121.92,146.558 h0.76 r90; Top Overlay "1  2  3  4" at 126.492,146.939 h0.89 r90
FOT5: Top Overlay "5" at 118.999,164.846 h0.89 r90; Top Overlay "Tx" at 119.507,159.639 h1.52 r90; Top Overlay "8" at 118.872,157.226 h0.89 r90; Top Overlay "Optical Fiber" at 121.92,156.718 h0.76 r90; Top Overlay "1  2  3  4" at 126.492,157.099 h0.89 r90
FOT6: Top Overlay "5" at 118.999,175.006 h0.89 r90; Top Overlay "Tx" at 119.507,169.799 h1.52 r90; Top Overlay "8" at 118.872,167.386 h0.89 r90; Top Overlay "Optical Fiber" at 121.92,166.878 h0.76 r90; Top Overlay "1  2  3  4" at 126.492,167.259 h0.89 r90
H1G: Top Overlay "SN74HC04N Hex Inverter" at 72.263,167.132 h0.64 r270; Top Overlay "Buffer" at 73.787,169.672 h0.64 r270
HT1: Top Overlay "Buffer" at 73.914,138.049 h0.64 r270; Top Overlay "SN74HC04N Hex Inverter" at 72.39,135.509 h0.64 r270
ISO1: Top Overlay "ACNW3130" at 72.136,207.518 h0.76
ISO2: Top Overlay "ACNW3130" at 86.36,207.391 h0.76
ISO3: Top Overlay "ACNW3130" at 114.427,209.931 h0.76
ISO4: Top Overlay "ACNW3130" at 158.877,208.407 h0.76
ISO5: Top Overlay "ACNW3130" at 186.055,207.899 h0.76
ISO6: Top Overlay "ACNW3130" at 199.263,207.899 h0.76
PS1: Top Overlay "V2" at 232.941,87.666 h1; Top Overlay "COM" at 232.941,95.066 h1; Top Overlay "V3" at 232.941,102.566 h1; Top Overlay "+V1" at 232.941,110.066 h1; Top Overlay "-V1" at 232.941,117.466 h1; Top Overlay "ACL" at 167.767,87.122 h1; Top Overlay "ACN" at 167.513,116.967 h1; Top Overlay "ECL30UT03-E" at 166.141,103.566 h5
PS2: Top Overlay "RAC01-05SC" at 212.695,134.175 h2.5 r90; Top Overlay "GND" at 207.975,156.675 h1 r90; Top Overlay "+5V" at 215.595,156.675 h1 r90; Top Overlay "ACL" at 223.215,134.175 h1 r90; Top Overlay "ACN" at 207.975,134.175 h1 r90
PS3: Top Overlay "KMS40-15" at 256.291,137.429 h5 r90; Top Overlay "NC" at 291.846,212.09 h1; Top Overlay "-DC" at 263.398,211.963 h1; Top Overlay "+DC" at 235.585,211.963 h1; Top Overlay "ACN" at 292.481,136.429 h1 r90; Top Overlay "ACL" at 236.601,136.429 h1 r90
R1S: Top Overlay "Res 5W" at 269.875,73.914 h1.52 r270
ZD1G: Top Overlay "ZENER 1W" at 72.009,221.107 h0.5 r270
ZD1S: Top Overlay "ZENER 0.4W" at 72.009,112.903 h0.5
ZD2G: Top Overlay "ZENER 1W" at 76.327,221.107 h0.5 r270
ZD2S: Top Overlay "ZENER 0.4W" at 72.009,107.315 h0.5
ZD3G: Top Overlay "ZENER 1W" at 94.488,221.615 h0.5
ZD3S: Top Overlay "ZENER 0.4W" at 72.009,101.727 h0.5
ZD4G: Top Overlay "ZENER 1W" at 105.029,217.17 h0.5
ZD4S: Top Overlay "ZENER 0.4W" at 72.009,96.139 h0.5
ZD5G: Top Overlay "ZENER 1W" at 127.635,227.33 h0.5
ZD5S: Top Overlay "ZENER 0.4W" at 71.882,90.297 h0.5
ZD6G: Top Overlay "ZENER 1W" at 136.779,227.33 h0.5
ZD7G: Top Overlay "ZENER 1W" at 146.431,206.375 h0.5
ZD8G: Top Overlay "ZENER 1W" at 155.448,206.121 h0.5 r90
ZD9G: Top Overlay "ZENER 1W" at 187.579,227.203 h0.5
ZD10G: Top Overlay "ZENER 1W" at 191.262,220.091 h0.5 r90
ZD11G: Top Overlay "ZENER 1W" at 203.2,215.646 h0.5
ZD12G: Top Overlay "ZENER 1W" at 200.787,220.345 h0.5